# Altium PCB STM8 Oscillograph.PcbDoc (part 1 of 3)
Units mm, origin at the board's own origin, x right, y up, seen from the top; angles counter-clockwise.
Board outline 26.01 x 35.08 mm, 2 copper layers (Top Layer, Bottom Layer); 152 components, 126 nets, 536 pads, 88 vias.
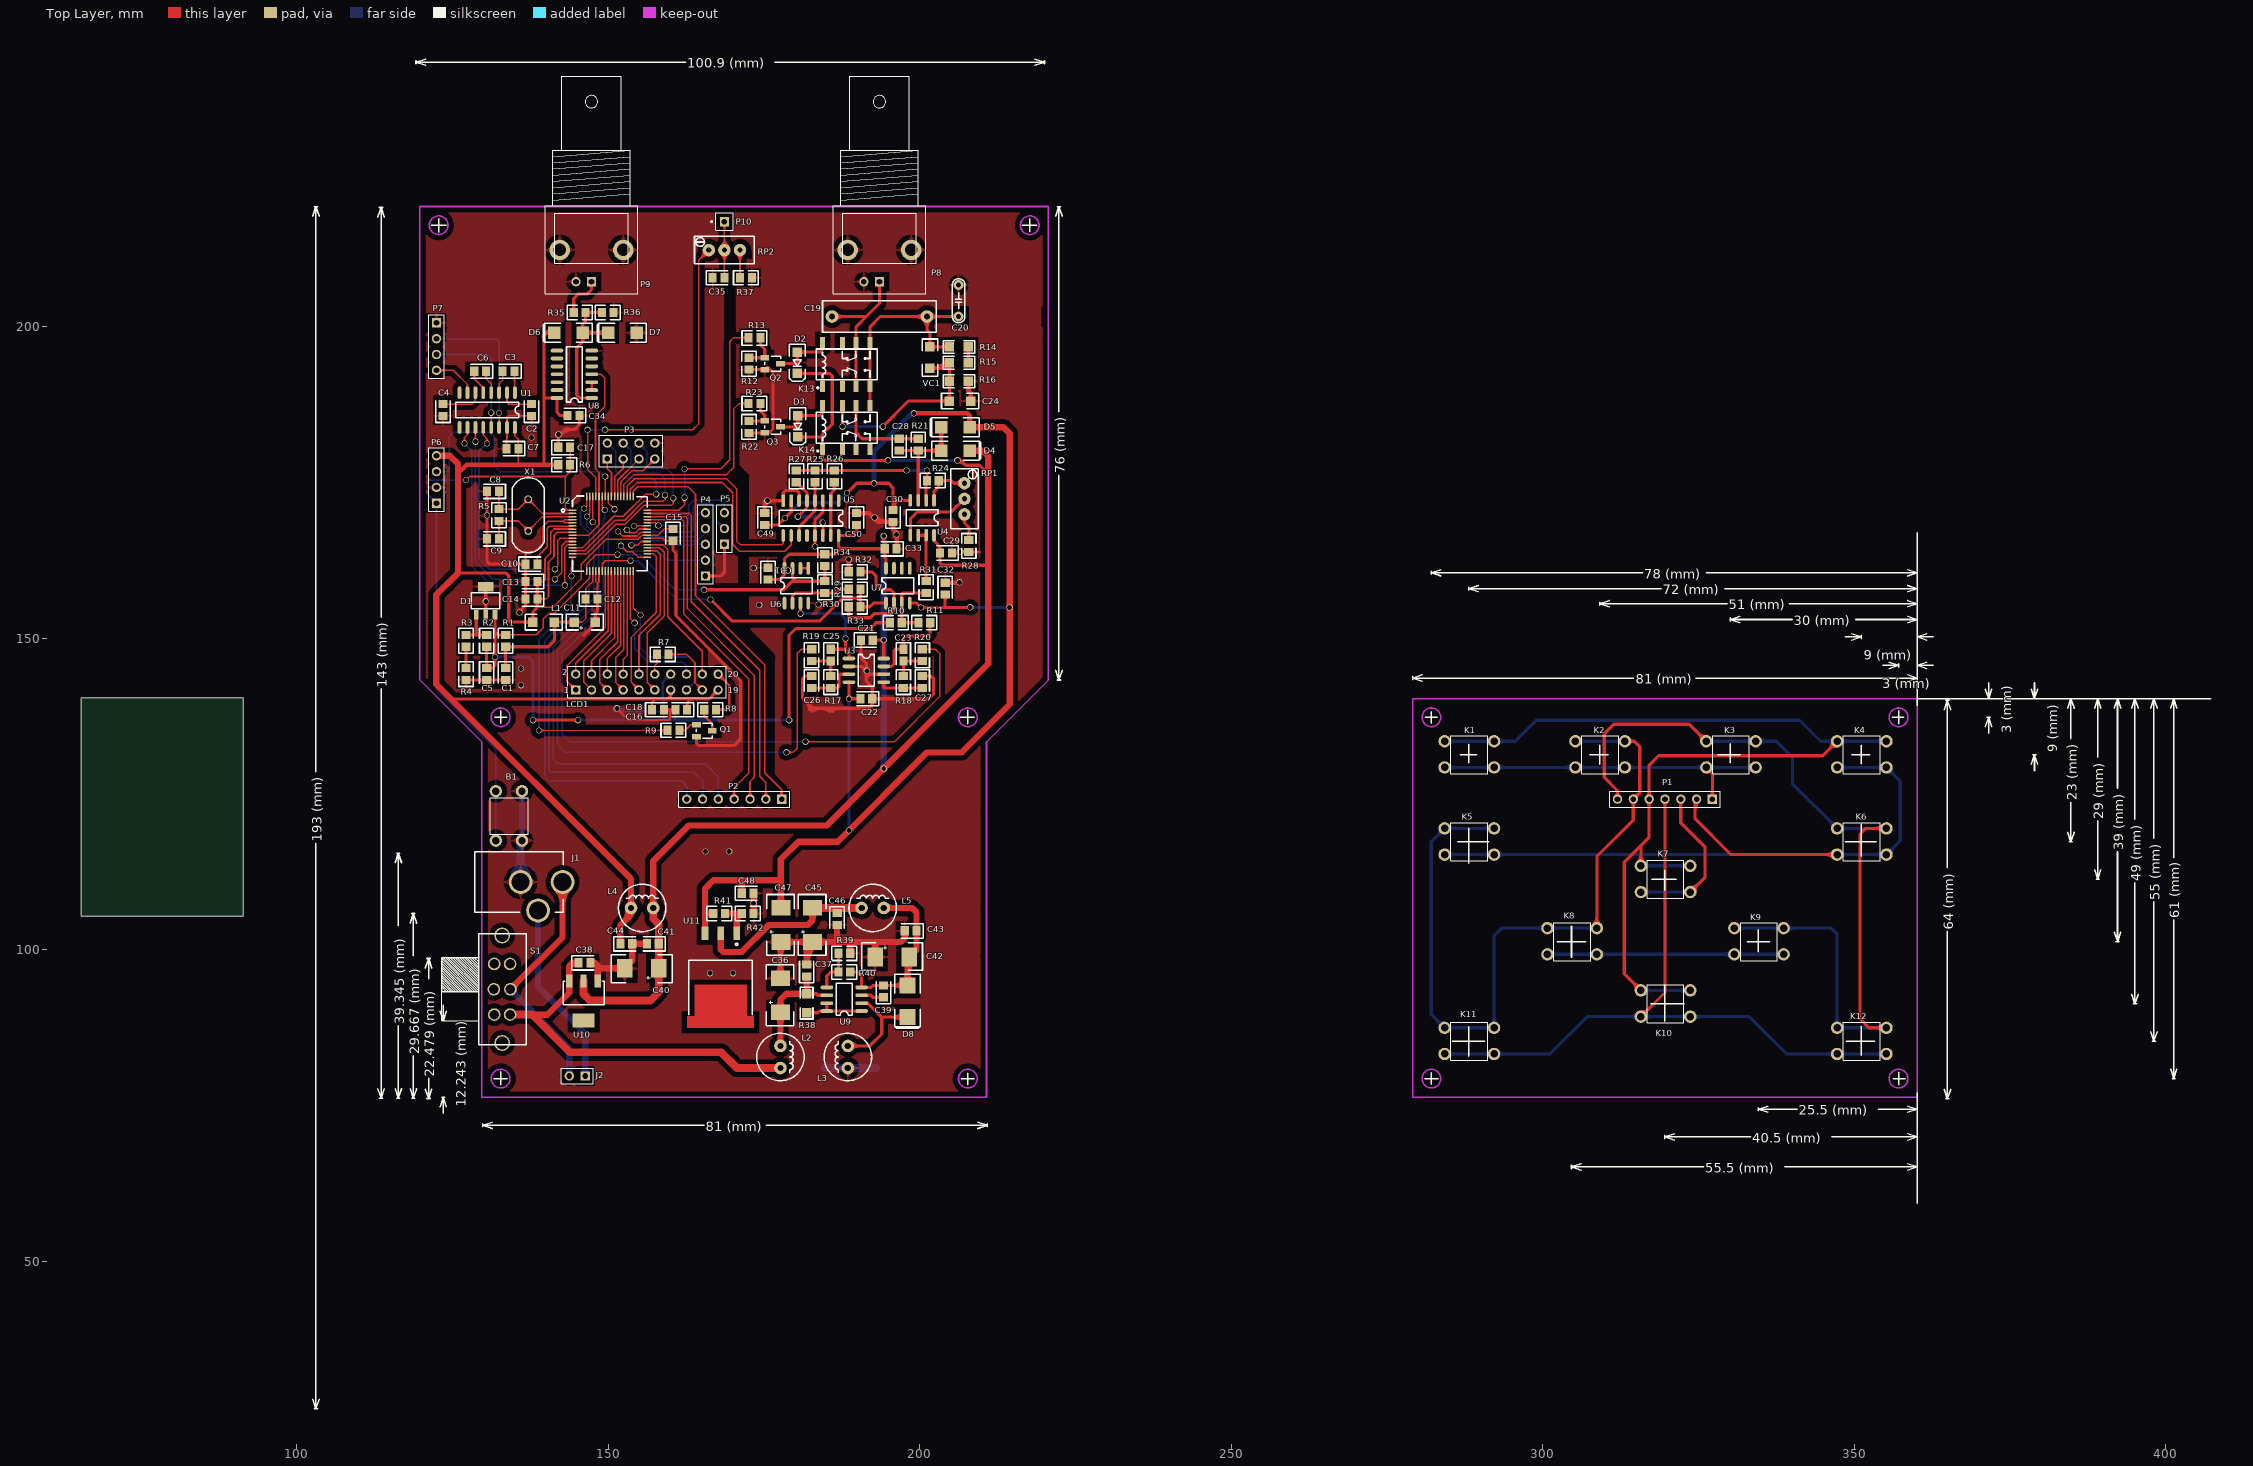
[diagram p0: Top Layer view]
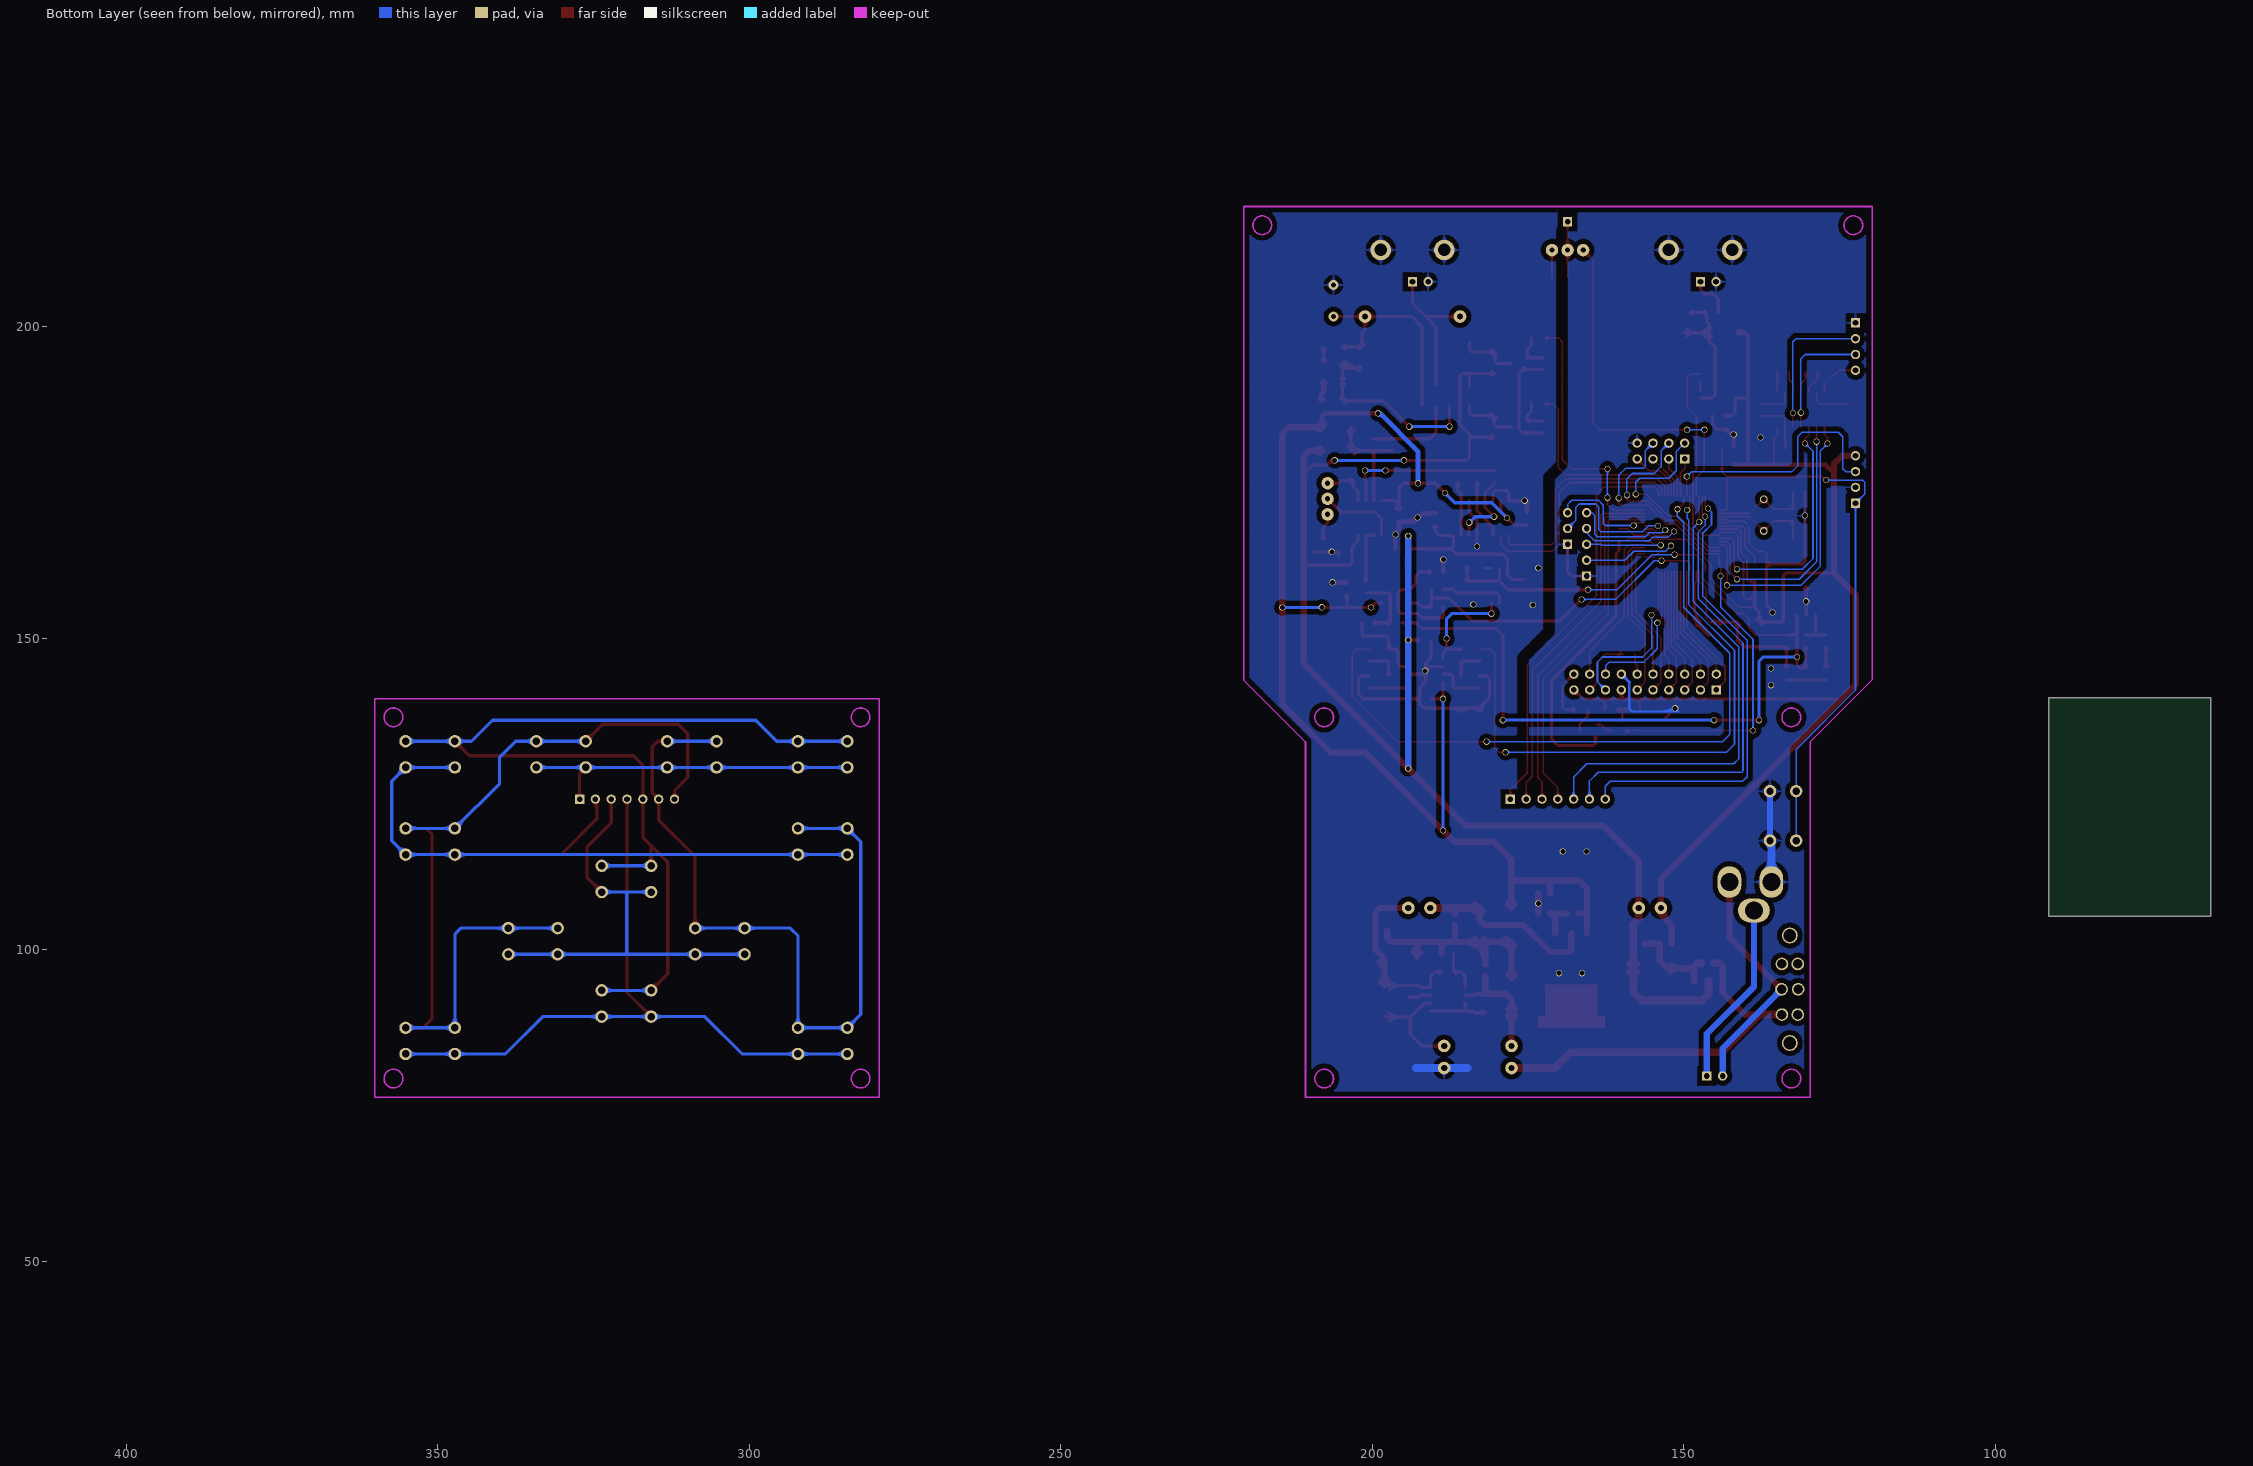
[diagram p1: Bottom Layer view, seen from below]

## Layer stack, top to bottom
Top Layer: signal copper 0.0356
Dielectric: dielectric 0.32, FR-4, Dk 4.8
Bottom Layer: signal copper 0.0356

## Board outline
65.38,140.487 91.389,140.487 91.389,105.41 65.38,105.41

## Design rules (kind name [scope] priority, off if disabled: settings)
Clearance [All] p1: gap=0.203
ComponentClearance [All] p1: gap=0.254 collisioncheckmode=3 verticalgap=0.254
PolygonConnect [All] p1: connectstyle=Relief reliefconductorwidth=0.254 reliefentries=4 polygonreliefangle="90 Angle"
RoomDefinition "Digital Part" [InComponentClass('Digital Part')] p1: confinementstyle=ConfineIn formatcopy=TRUE lockcomponents=FALSE outline 104.877,42.697 361.569,42.697 361.569,243.408 104.877,243.408
RoomDefinition CH1_ANALOG [InComponentClass('CH1_ANALOG')] p2: confinementstyle=ConfineIn formatcopy=TRUE lockcomponents=FALSE outline 157.074,138.735 219.354,138.735 219.354,241.122 157.074,241.122
RoomDefinition CH2_DIGITAL [InComponentClass('CH2_DIGITAL')] p3: confinementstyle=ConfineIn formatcopy=TRUE lockcomponents=FALSE outline 136.423,175.997 176.403,175.997 176.403,241.579 136.423,241.579
RoomDefinition Power [InComponentClass('Power')] p4: confinementstyle=ConfineIn formatcopy=TRUE lockcomponents=FALSE outline 118.923,74.092 210.49,74.092 210.49,127.66 118.923,127.66
RoutingVias [All] p1: holewidth=0.8 width=1 viastyle="Through Hole" minholewidth=0 minwidth=0 maxholewidth=10 maxwidth=20
SolderMaskExpansion [All] p1: expansion=0.102
TestPointUsage [All] p1: valid=0 allowmultiple=FALSE
Testpoint [All] p1: side=15 testpointundercomponent=TRUE minsize=1.016 maxsize=2.54 preferedsize=1.524 minholesize=0 maxholesize=1.016 preferedholesize=0.813 testpointgrid=0.025 style=1023 order=0123456789
Width [All] p1: maxlimit=2.54 minlimit=0.254 preferedwidth=0.254
18 further rules are at their usual default settings.

## Classes and differential pairs
component class CH1_ANALOG: C19 C20 C21 C22 C23 C24 C25 C26 C27 C28 C29 C30 C31 C32 C33 C49 C50 D2 D3 D4 D5 K13 K14 P8 Q2 Q3 R10 R11 R12 R13 R14 R15 R16 R17 R18 R19 R20 R21 R22 R23 R24 R25 R26 R27 R28 R29 R30 R31 R32 R33 R34 RP1 U3 U4 U5 U6 U7 VC1
component class CH2_DIGITAL: C34 C35 D6 D7 P9 P10 R35 R36 R37 RP2 U8
component class "Digital Part": B1 C1 C2 C3 C4 C5 C6 C7 C8 C9 C10 C11 C12 C13 C14 C15 C16 C17 C18 D1 K1 K2 K3 K4 K5 K6 K7 K8 K9 K10 K11 K12 L1 LCD1 P1 P2 P3 P4 P5 P6 P7 Q1 R1 R2 R3 R4 R5 R6 R7 R8 R9 U1 U2 X1
component class Power: C36 C37 C38 C39 C40 C41 C42 C43 C44 C45 C46 C47 C48 D8 J1 J2 L2 L3 L4 L5 R38 R39 R40 R41 R42 S1 U9 U10 U11

## Components (designator, comment, footprint, x,y, rotation, side; value= is the part's Value field where it differs from the comment)
B1 "RESET" PB-2 134.112,121.412 r180 top
C1 "100nF" CC2012-0805#1 133.655,144.287 r0 top
C2 "100nF" CC2012-0805#1 137.566,186.665 r180 top
C3 "100nF" CC2012-0805#1 134.01,192.761 r270 top
C4 "100nF" CC2012-0805#1 123.342,186.665 r180 top
C5 "100nF" CC2012-0805#1 130.607,144.287 r0 top
C6 "100nF" CC2012-0805#1 129.438,192.761 r270 top
C7 "100nF" CC2012-0805#1 134.62,180.34 r270 top
C8 "20pF" CC2012-0805#1 131.511,173.482 r270 top
C9 "20pF" CC2012-0805#1 131.511,165.862 r270 top
C10 "470nF" CC2012-0805#1 137.668,162.052 r90 top
C11 "10uF" C-1206 146.304,153 r180 top
C12 "100nF" CC2012-0805#1 147.32,156.464 r90 top
C13 "100nF" CC2012-0805#1 137.668,159.004 r270 top
C14 "100nF" CC2012-0805#1 137.668,156.21 r270 top
C15 "100nF" CC2012-0805#1 160.528,166.624 r0 top
C16 "100nF" CC2012-0805#1 161.723,138.43 r270 top
C17 "100nF" CC2012-0805#1 142.926,180.797 r90 top
C18 "100nF" CC2012-0805#1 157.988,138.684 r90 top
C19 "Cap" "CBB CAP" 193.548,201.676 r0 top
C20 "Cap" CO2 206.248,204.216 r270 top
C21 "Cap" CC2012-0805#1 191.516,149.86 r90 top
C22 "Cap" CC2012-0805#1 191.44,140.183 r270 top
C23 "Cap" CC2012-0805#2 197.51,147.32 r0 top
C24 "Cap" C1206 206.426,187.731 r0 top
C25 "Cap" CC2012-0805#2 185.851,147.32 r0 top
C26 "Cap" CC2012-0805#1 182.778,143.002 r0 top
C27 "Cap" CC2012-0805#1 200.558,143.002 r0 top
C28 "Cap" CC2012-0805#1 196.596,181.102 r180 top
C29 "Cap" CC2012-0805#1 204.216,163.576 r270 top
C30 "Cap" CC2012-0805#1 195.58,169.672 r180 top
C31 "Cap" CC2012-0805#1 175.768,160.401 r0 top
C32 "Cap" CC2012-0805#1 204.216,157.988 r0 top
C33 "Cap" CC2012-0805#1 195.351,164.262 r270 top
C34 "Cap" CC2012-0805#1 144.424,185.649 r270 top
C35 "Cap" CC2012-0805#1 167.706,208.026 r90 top
C36 "100uF" "Cap 3X6" 177.648,92.634 r90 top
C37 "100nF" CC2012-0805#1 181.737,96.698 r180 top
C38 "100nF" CC2012-0805#1 146.177,98.044 r90 top
C39 "470pF" CC2012-0805#1 194.056,93.345 r180 top
C40 "100uF" "Cap 3X6" 155.448,97.028 r180 top
C41 "100nF" CC2012-0805#1 157.165,100.838 r270 top
C42 "1000uF" "Cap 3X6" 195.504,98.857 r0 top
C43 "100nF" CC2012-0805#1 198.552,102.921 r270 top
C44 "100nF" CC2012-0805#1 152.908,101.092 r90 top
C45 "100uF" "Cap 3X6" 182.804,103.937 r90 top
C46 "100nF" CC2012-0805#1 186.868,104.953 r0 top
C47 "100uF" "Cap 3X6" 177.724,103.937 r90 top
C48 "100nF" CC2012-0805#1 172.39,109.22 r90 top
C49 "Cap" CC2012-0805#1 175.26,169.164 r0 top
C50 "Cap" CC2012-0805#1 189.992,169.164 r0 top
D1 "TL431" SOT-89 130.327,156.301 r0 top
D2 "IN4148" DIODE 180.34,194.056 r90 top
D3 "IN4148" DIODE 180.442,183.871 r90 top
D4 "Diode" SMA 205.74,180.152 r180 top
D5 "Diode" SMA 205.74,183.896 r0 top
D6 "Diode" SMA 143.637,199.06 r0 top
D7 "Diode" SMA 152.273,199.06 r0 top
D8 "1N5819" SMC 198.044,91.745 r90 top
J1 "PWR2.5" "DC JACK" 135.941,110.896 r0 top
J2 "BAT" HDR1X2 146.304,79.756 r180 top
K1 "" PB-2 288.146,131.335 r90 top locked
K2 "" PB-2 309.146,131.335 r90 top locked
K3 "" PB-2 330.146,131.335 r90 top locked
K4 "" PB-2 351.146,131.335 r90 top locked
K5 "" PB-2 288.146,117.348 r90 top locked
K6 "" PB-2 351.146,117.348 r90 top locked
K7 "" PB-2 319.646,111.335 r90 top locked
K8 "" PB-2 304.646,101.335 r90 top locked
K9 "" PB-2 334.646,101.335 r90 top locked
K10 "" PB-2 319.646,91.335 r90 top locked
K11 "" PB-2 288.146,85.335 r90 top locked
K12 "" PB-2 351.146,85.335 r90 top locked
K13 "G6K-2F-Y" G6K-2F-Y 184.404,190.5 r0 top
K14 "G6K-2F-Y" G6K-2F-Y 184.404,180.34 r0 top
L1 "100uH" L-1206 139.7,153 r180 top
L2 "10uH" L1.4/3 177.648,82.804 r270 top
L3 "220uH" L1.4/3 188.468,82.804 r90 top
L4 "10uH" L1.4/3 155.448,106.734 r0 top
L5 "10uH" L1.4/3 192.456,106.734 r0 top
LCD1 "LCM19264" HDR2X10 144.78,141.732 r0 top
P1 "Header 7" HDR1X7 327.266,124.206 r180 top locked
P2 "Header 7" HDR1X7 177.845,124.206 r180 top locked
P3 "Rev IO" HDR2X4_CEN 149.86,178.816 r0 top
P4 "SPI" HDR1X5 165.608,160.02 r90 top
P5 "CAN" HDR1X3 168.656,165.1 r90 top
P6 "SWIM" HDR1X4 122.428,171.704 r90 top
P7 "UART" HDR1X4 122.428,200.66 r270 top
P8 "CH1" "BNC_RA CON" 193.548,207.264 r270 top
P9 "CH2" "BNC_RA CON" 147.32,207.264 r270 top
P10 "PROBE_CAL" PIN1 168.656,216.916 r90 top
Q1 "9014" SOT-23 165.303,135.128 r270 top
Q2 "9014" SOT-23 176.276,194.056 r270 top
Q3 "9014" SOT-23 176.276,183.896 r270 top
R1 "680" CR2012-0805 133.655,149.875 r180 top
R2 "100K" CR2012-0805 130.607,149.875 r180 top
R3 "30K" CR2012-0805 127.051,149.367 r0 top
R4 "2K" CR2012-0805 127.051,144.033 r0 top
R5 "1M" CR2012-0805 132.588,170.053 r180 top
R6 "10K" CR2012-0805 143.18,177.749 r90 top
R7 "*" CR2012-0805 159.004,147.32 r90 top
R8 "3.3K" CR2012-0805 166.624,138.43 r90 top
R9 "3.3K" CR2012-0805 160.731,135.128 r90 top
R10 "Res2" CR2012-0805 195.925,152.654 r270 top
R11 "Res2" CR2012-0805 201,152.4 r90 top
R12 "Res2" CR2012-0805 172.72,194.361 r180 top
R13 "Res2" CR2012-0805 173.736,198.12 r90 top
R14 "Res2" R-1206 206.299,196.799 r180 top
R15 "Res2" R-1206 206.299,194.259 r0 top
R16 "Res2" R-1206 206.299,191.287 r180 top
R17 "Res2" CR2012-0805 185.851,143.256 r180 top
R18 "Res2" CR2012-0805 197.51,143.256 r180 top
R19 "Res2" CR2012-0805 182.778,147.574 r180 top
R20 "Res2" CR2012-0805 200.558,147.574 r180 top
R21 "Res2" CR2012-0805 199.898,181.356 r180 top
R22 "Res2" CR2012-0805 172.72,184.201 r180 top
R23 "Res2" CR2012-0805 173.736,187.579 r90 top
R24 "Res2" CR2012-0805 201.854,175.463 r270 top
R25 "Res2" CR2012-0805 183.312,176.276 r180 top
R26 "Res2" CR2012-0805 186.436,176.276 r180 top
R27 "Res2" CR2012-0805 180.34,176.276 r180 top
R28 "Res2" CR2012-0805 207.772,164.592 r0 top
R29 "Res2" CR2012-0805 189.306,158.013 r270 top
R30 "Res2" CR2012-0805 184.912,158.496 r180 top
R31 "Res2" CR2012-0805 201.168,158.496 r180 top
R32 "Res2" CR2012-0805 189.814,160.553 r90 top
R33 "Res2" CR2012-0805 189.306,155.2 r270 top
R34 "Res2" CR2012-0805 184.658,162.306 r0 top
R35 "Res2" CR2012-0805 145.669,202.184 r90 top
R36 "Res2" CR2012-0805 149.667,202.438 r270 top
R37 "Res2" CR2012-0805 172.36,207.772 r90 top
R38 "0.51" R-1206 181.864,91.44 r270 top
R39 "7.5K" CR2012-0805 187.655,99.568 r270 top
R40 "1.5K" CR2012-0805 188.163,96.317 r90 top
R41 "120" CR2012-0805 167.564,105.969 r270 top
R42 "360" CR2012-0805 172.136,105.969 r270 top
RP1 "RPot" VR 207.188,172.415 r90 top
RP2 "2K" VR 168.656,212.344 r180 top
S1 "SW-Power" SW-6B 132.969,93.675 r90 top
U1 "ST3232ECTR" SO-16 129.946,186.665 r270 top
U2 "STM8S208RBT6" TQFP-64 150.368,166.497 r270 top locked
U3 "LM358" SO-8 191.44,144.247 r0 top
U4 "TL082" SO-8 199.771,169.367 r270 top
U5 "74VHC4052WM" SO-16 181.915,169.316 r270 top
U6 "LM311N" SO-8 180.848,158.471 r90 top
U7 "TL082" SO-8 197.129,158.471 r90 top
U8 "7404" SO-14 144.577,192.405 r180 top
U9 "MC34063" SO-8 187.884,92.71 r180 top
U10 "AMS1117-5" SOT-223 145.796,91.948 r90 top
U11 "LM337" D2PAK 168.072,97.841 r180 top
VC1 "Cap Var" C1206 201.27,195.148 r270 top
X1 "16MHz" CRYSTAL 137.16,169.799 r180 top

## Footprints (in the part's own frame and the unit in brackets; to place one, negate y for a bottom-side part, rotate by r counter-clockwise, add the part's x,y. Pads: shape width x height; smd on the part's side, far side on the other; paste and mask are expansions set on the pad)
"BNC_RA CON" [mm] "Connector; BNC Elbow"
  rect 1.5x1.5 hole 0.9: 1(0,0)
  round 3.3 hole 2: 2(-5.1,5.1) 2(-5.1,-5.1)
  round 1.5 hole 0.9: 2(0,-2.5)
  silkscreen extent -33,-7.4 1.9,7.4
C1206 [mil] "C1206"
  rect 60x60 smd: 1(70,15) 2(-65,15)
  silkscreen extent -115,-35 120,65
C-1206 [mil] "C-1206"
  rect 60x60 smd: 1(70,15) 2(-65,15)
  silkscreen extent -115,-35 120,65
"Cap 3X6" [mm] "CAP 3X6"
  rect 2.5x3 smd: 1(-2.667,0) 2(2.797,0)
  silkscreen extent -4.83,-2.16 4.95,2.29
"CBB CAP" [mil] "CBB CAP"
  round 80 hole 40: 1(-300,0) 2(300,0)
  silkscreen extent -360,-100 360,100
CC2012-0805#1 [mm] "CC2012-0805"
  rect 1.5x1.3 smd: 1(-0.127,0.95) 2(-0.127,-0.95)
  silkscreen extent -1.28,-1.5 1.02,2
CC2012-0805#2 [mm] "CC2012-0805"
  rect 1.3x1.5 smd: 1(-0.127,0.95) 2(-0.127,-0.95)
  silkscreen extent -1.28,-1.5 1.02,2
CO2 [mil] "CO2"
  round 62 hole 32: 1(-100,0) 2(100,0)
  silkscreen extent -140,-40 140,40
CR2012-0805 [mm] "CR2012-0805"
  rect 1.5x1.3 smd: 1(0.127,1.204) 2(0.127,-0.696)
  silkscreen extent -1.02,-1.75 1.28,2.25
CRYSTAL [mil] "CRYSTAL"
  round 50 hole 32: 1(0,100) 2(0,-100)
  silkscreen extent -100,-238 100,238
D2PAK [mm] "D2PAK"
  rect 1.07x2.16 smd: 1(-2.54,-4.851) 2(0,-4.851) 3(2.54,-4.851)
  Top Layer region: -5.339,10.389 -5.339,8.479 5.461,8.479 5.461,10.389
  Top Layer region: -4.191,8.478 -4.191,3.398 4.226,3.398 4.226,8.478
  silkscreen extent -5.04,-3.23 5.16,8.28
"DC JACK" [mil] "DC JACK"
  round 150 / inner round 150 / far side oval 150x200 hole 115: 1(265,0) 2(0,0)
  round 150 / inner round 150 / far side oval 200x150 hole 115: 3(110,-180)
  silkscreen extent -290,-190 270,190
DIODE [mil] "DIODE"
  rect 60x60 smd: 1(75,0) 2(-60,0)
  silkscreen extent -110,-50 125,50
G6K-2F-Y [mm] "G6K-2F-Y"
  rect 0.8x1.8 smd: 1(0,0) 2(3.2,0) 3(5.4,0) 4(7.6,0) 5(7.6,7) 6(5.4,7) 7(3.2,7) 8(0,7)
  silkscreen extent -1.02,-0.38 8.76,5.97
HDR1X2 [mm] "Connector; Header; 2 Position"
  rect 1.5x1.5 hole 0.9: 1(0,0)
  round 1.5 hole 0.9: 2(2.54,0)
  silkscreen extent -1.27,-1.27 3.81,1.27
HDR1X3 [mm] "Connector; Header; 3 Position"
  rect 1.5x1.5 hole 0.9: 1(0,0)
  round 1.5 hole 0.9: 2(2.54,0) 3(5.08,0)
  silkscreen extent -1.27,-1.27 6.35,1.27
HDR1X4 [mm] "Connector; Header; 4 Position"
  rect 1.5x1.5 hole 0.9: 1(0,0)
  round 1.5 hole 0.9: 2(2.54,0) 3(5.08,0) 4(7.62,0)
  silkscreen extent -1.27,-1.27 8.89,1.27
HDR1X5 [mm] "Connector; Header; 5 Position"
  rect 1.5x1.5 hole 0.9: 1(0,0)
  round 1.5 hole 0.9: 2(2.54,0) 3(5.08,0) 4(7.62,0) 5(10.16,0)
  silkscreen extent -1.27,-1.27 11.43,1.27
HDR1X7 [mm] "Connector; Header; 7 Position"
  rect 1.5x1.5 hole 0.9: 1(0,0)
  round 1.5 hole 0.9: 2(2.54,0) 3(5.08,0) 4(7.62,0) 5(10.16,0) 6(12.7,0) 7(15.24,0)
  silkscreen extent -1.27,-1.27 16.51,1.27
HDR2X4_CEN [mm] "Connector; Header; 4x2 Position"
  rect 1.5x1.5 hole 0.9: 1(0,0)
  round 1.5 hole 0.9: 2(2.54,0) 3(5.08,0) 4(7.62,0) 5(0,2.54) 6(2.54,2.54) 7(5.08,2.54) 8(7.62,2.54)
  silkscreen extent -1.27,-1.27 8.89,3.81
HDR2X10 [mm] "Connector; Header; 10x2 Position"
  rect 1.5x1.5 hole 0.9: 1(0,0)
  round 1.5 hole 0.9: 2(0,2.54) 3(2.54,0) 4(2.54,2.54) 5(5.08,0) 6(5.08,2.54) 7(7.62,0) 8(7.62,2.54) 9(10.16,0) 10(10.16,2.54) 11(12.7,0) 12(12.7,2.54) 13(15.24,0) 14(15.24,2.54) 15(17.78,0) 16(17.78,2.54) 17(20.32,0) 18(20.32,2.54) 19(22.86,0) 20(22.86,2.54)
  silkscreen extent -1.27,-1.27 24.13,3.81
L1.4/3 [mil] "L1.4/3"
  round 80 hole 40: 1(70,0) 2(-70,0)
  silkscreen extent -150,-150 150,150
L-1206 [mil] "L-1206"
  rect 60x60 smd: 1(70,15) 2(-65,15)
  silkscreen extent -115,-35 120,65
PB-2 [mm] "PB-2"
  round 2 hole 1.2: 1(-2.048,-4.064) 2(2.159,-4.064) 3(2.159,3.866) 4(-2.048,3.866)
  silkscreen extent -3.05,-3.05 3.05,2.87
PIN1 [mm] "Connector; Plug"
  rect 1.5x1.5 hole 0.9: 1(0,0)
  silkscreen extent -1.4,-1.4 1.4,2.17
R-1206 [mil] "R-1206"
  rect 60x60 smd: 1(-60,0) 2(60,0)
  silkscreen extent -100,-40 100,40
SMA [mil] "SMA"
  rect 80x80 smd: 1(90,0) 2(-90,0)
  silkscreen extent -160,-60 150,60
SMC [mm] "SMC"
  rect 2.54x2.54 smd: 1(2.54,0) 2(-2.54,0)
  silkscreen extent -4.32,-2.03 4.32,2.03
SO-8 [mil] "SO-8"
  oval 80x24 smd: 1(-110,100) 2(-110,50) 3(-110,0) 4(-110,-50) 5(110,-50) 6(110,0) 7(110,50) 8(110,100)
  silkscreen extent -50,-75 50,125
SO-14 [mil] "SO-14"
  oval 80x24 smd: 1(-110,150) 2(-110,100) 3(-110,50) 4(-110,0) 5(-110,-50) 6(-110,-100) 7(-110,-150) 8(110,-150) 9(110,-100) 10(110,-50) 11(110,0) 12(110,50) 13(110,100) 14(110,150)
  silkscreen extent -50,-175 50,175
SO-16 [mil] "SO-16"
  oval 80x24 smd: 1(-110,200) 2(-110,150) 3(-110,100) 4(-110,50) 5(-110,0) 6(-110,-50) 7(-110,-100) 8(-110,-150) 9(110,-150) 10(110,-100) 11(110,-50) 12(110,0) 13(110,50) 14(110,100) 15(110,150) 16(110,200)
  silkscreen extent -50,-175 50,225
SOT-23 [mil]
  rect 35x55 smd: 1(-40,-45) 2(35,-45) 3(-2.5,55)
  silkscreen extent -50,-45 45,55
SOT-89 [mil] "SOT-89"
  rect 30x60 smd: 1(-59.06,-100) 2(0,-100) 3(59.06,-100)
  rect 100x60 smd: 2(0,80)
  silkscreen extent -90,-60 90,40
SOT-223 [mil] "SOT-223"
  rect 80x39.37 smd: 1(120,-100) 2(120,-9.45) 3(120,81.1)
  rect 90x140 smd: 4(-130,-10)
  silkscreen extent -30,-140 120,120
SW-6B [mil]
  round 100 hole 80: 0(-340,0) 0(340,0)
  round 80 hole 60: 1(0,-52.5) 2(160,-50) 3(-160,-50) 4(0,52.5) 5(160,50) 6(-160,50)
  silkscreen extent -350,-153 350,382
TQFP-64 [mm] "TQFP-64"
  rect 0.25x1.27 smd: 1(-4.064,-6.096)
  oval 0.25x1.27 smd: 2(-3.564,-6.096) 3(-3.064,-6.096) 4(-2.564,-6.096) 5(-2.064,-6.096) 6(-1.564,-6.096) 7(-1.064,-6.096) 8(-0.564,-6.096) 9(-0.064,-6.096) 10(0.436,-6.096) 11(0.936,-6.096) 12(1.436,-6.096) 13(1.936,-6.096) 14(2.436,-6.096) 15(2.936,-6.096) 16(3.436,-6.096) 33(3.436,5.904) 34(2.936,5.904) 35(2.436,5.904) 36(1.936,5.904) 37(1.436,5.904) 38(0.936,5.904) 39(0.436,5.904) 40(-0.064,5.904) 41(-0.564,5.904) 42(-1.064,5.904) 43(-1.564,5.904) 44(-2.064,5.904) 45(-2.564,5.904) 46(-3.064,5.904) 47(-3.564,5.904) 48(-4.064,5.904)
  oval 1.27x0.25 smd: 17(5.686,-3.846) 18(5.686,-3.346) 19(5.686,-2.846) 20(5.686,-2.346) 21(5.686,-1.846) 22(5.686,-1.346) 23(5.686,-0.846) 24(5.686,-0.346) 25(5.686,0.154) 26(5.686,0.654) 27(5.686,1.154) 28(5.686,1.654) 29(5.686,2.154) 30(5.686,2.654) 31(5.686,3.154) 32(5.686,3.654) 49(-6.314,3.654) 50(-6.314,3.154) 51(-6.314,2.654) 52(-6.314,2.154) 53(-6.314,1.654) 54(-6.314,1.154) 55(-6.314,0.654) 56(-6.314,0.154) 57(-6.314,-0.346) 58(-6.314,-0.846) 59(-6.314,-1.346) 60(-6.314,-1.846) 61(-6.314,-2.346) 62(-6.314,-2.846) 63(-6.314,-3.346) 64(-6.314,-3.846)
  silkscreen extent -6.36,-7.87 5.74,5.9
VR [mm] "VR"
  round 2 hole 0.85: 1(-2.5,0) 2(0,0) 3(2.5,0)
  silkscreen extent -4.8,-2.2 4.8,2.2

## Part data
B1: library part "SW PUSHBUTTON", "SE PUSHBUTTON"
C1 C2 C3 C4 C5 C6 C7 C8 C9 C10 C12 C13 C14 C15 C16 C17 C18 C38: library part CAP, "Capacitor"
C11: library part "Cap Pol1", "Polarized Capacitor (Radial)"
C19 C20 C21 C22 C23 C24 C25 C26 C27 C28 C29 C30 C31 C32 C33 C34 C35 C49 C50: "Capacitor"
C36 C40 C42 C45 C47: library part "CAPACITOR POL", "Capacitor"
C37 C39 C41 C43 C44 C46 C48: library part Cap, "Capacitor"
D2 D3: library part Diode, "Default Diode"
D4 D5 D6 D7: "Default Diode"
D8: library part "D Zener", "Zener Diode"
J1: "Low Voltage Power Supply Connector"
J2: library part "Header 2", "Header, 2-Pin"
K1 K2 K3 K4 K5 K6 K7 K8 K9 K10 K11 K12: library part SW-PB
K13: library part Relay-SPST, "Single-Pole Single-Throw Relay"
K14: library part Relay-SPDT, "Single-Pole Dual-Throw Relay"
L1: library part Inductor, "Inductor"
L2 L3 L4 L5: library part "Inductor Iron", "Magnetic-Core Inductor"
P1 P2: "Header, 7-Pin"
P3: library part "Header 4X2A", "Header, 4-Pin, Dual row"
P4: library part "Header 5", "Header, 5-Pin"
P5: library part "Header 3", "Header, 3-Pin"
P6 P7: library part "Header 4", "Header, 4-Pin"
P8 P9: library part BNC, "BNC Elbow Connector"
P10: library part Plug, "Plug"
Q1: library part 2N3904, "NPN General Purpose Amplifier"
Q2 Q3: library part NPN, "NPN Bipolar Transistor"
R1 R2 R3 R4 R5 R6 R7 R8 R9 R38 R39 R40 R41 R42: library part Res2, "Resistor"
R10 R11 R12 R13 R14 R15 R16 R17 R18 R19 R20 R21 R22 R23 R24 R25 R26 R27 R28 R29 R30 R31 R32 R33 R34 R35 R36 R37: "Resistor"
RP1: "Potentiometer"
RP2: library part RPot, "Potentiometer"
S1: library part SW-SPDT, "SPDT Subminiature Toggle Switch, Right Angle Mounting, Vertical Actuation"
U1: library part ST3232, "3.3V/5V Dual RS232 Transceiver w/ Int. Cap."
U5: "Dual 4-Channel Analog Multiplexer"
U6: "High-Performance Voltage Comparator"
U10: library part "Volt Reg", "Voltage Regulator"
VC1: "Variable or Adjustable Capacitor"
X1: library part CRYSTAL, "Crystal"

## Via types
v1: diameter 1, hole 0.8, Top Layer to Bottom Layer, tented both sides, 88 vias

## Nets (pads, with @x,y where several pads share a name; then routed paths per layer and width w, separated by ;. In a path a pad name is that pad's centre, name@x,y a point inside that pad or via, vN(x,y) a via of type N, cw(c..) or ccw(c..) an arc to the next point about the centre after c; other vN are vias at no path point)
+5V: C21.2 C29.2 C31.2 C33.2 C40.1 C41.1 C50.2 D2.2 D3.2 D4.2 K13.1 K14.1 L4.1 R34.1 U3.8 U4.8 U5.16 U6.8 U7.8 U10.2 | length 311.4
  Top Layer w0.508: C31.2@175.646,159.446 177.531,159.446 178.308,160.223 178.308,162.789 179.029,163.51 186.472,163.51 187.35,164.389 ; 177.988,159.903 ccw(c177.337,160.553) U6.8@178.257,160.553 ; D2.2@180.34,192.532 185.547,192.532 185.953,192.126 185.953,184.379 184.404,182.829 184.404,178.968 184.785,178.587 v1(194.894,178.587) ; D3.2@180.442,182.347 184.074,182.347 184.404,182.016 ; D2.2@180.699,192.173 cw(c181.566,191.306) 181.566,192.532 cw(c181.566,193.758) D2.2@180.699,192.891 ; D3.2@180.801,181.987 cw(c181.668,181.12) 181.668,182.347 cw(c181.668,183.573) D3.2@180.801,182.706 ; 184.125,192.532 184.404,192.253 K13.1@184.404,190.5 ; C50.2@189.585,167.934 cw(c188.909,167.258) 189.865,167.258 cw(c190.821,167.258) C50.2@190.145,167.934 ; C50.2@189.865,168.214 189.865,167.157 189.23,166.522 U5.16@186.995,166.522 186.995,164.744 187.35,164.389 ; C21.2@192.466,149.733 v1@194.132,149.733 ; C21.2@192.746,149.453 cw(c193.422,148.777) 193.422,149.733 cw(c193.422,150.689) C21.2@192.746,150.013 ; v1@194.06,149.907 cw(c193.64,150.327) 193.64,149.733 cw(c193.64,149.139) 194.06,149.559 cw(c193.641,149.14) 194.234,149.14 ; v1@194.06,166.272 cw(c193.641,165.853) 194.234,165.853 ; C33.2@194.121,164.109 ccw(c193.445,163.433) 193.445,164.389 ccw(c193.445,165.345) C33.2@194.121,164.669 ; U3.8@194.234,146.787 v1(194.234,149.733) ; 194.234,149.139 cw(c194.828,149.139) v1@194.408,149.559 ; 194.234,165.852 cw(c194.828,165.852) v1@194.408,166.272 ; v1(194.234,166.446) 194.234,165.583 194.401,165.415 194.401,163.027 194.589,162.839 U7.8@194.589,161.265 ; 194.299,178.587 cw(c194.299,177.992) v1@194.72,178.413 ; 194.301,178.587 ccw(c194.301,179.18) v1@194.72,178.761 ; C33.2@194.401,164.389 187.35,164.389 ; U4.8@202.311,166.573 202.311,165.633 203.266,164.678 203.266,162.077 203.596,161.747 211.023,161.747 ; U4.8@202.362,165.862 ccw(c203.036,165.862) 202.559,165.385 ; 202.838,165.106 cw(c201.535,163.803) C29.2@203.378,163.803 ; v1@206.045,178.341 cw(c206.045,176.398) 207.419,177.772 ; v1(206.045,178.587) 206.604,178.587 ; v1@206.045,178.849 cw(c206.045,178.132) 206.552,178.639 ; v1@206.179,178.381 cw(c206.486,177.911) 206.883,178.308 ; v1@206.227,178.421 cw(c206.604,178.077) 206.604,178.587 ; v1@206.226,178.753 ccw(c206.604,179.1) 206.604,178.587 ; 211.023,176.378 209.601,177.8 207.391,177.8 206.604,178.587
  Top Layer w1.016: L4.1@156.867,107.093 ccw(c156,107.96) 157.226,107.96 ccw(c158.452,107.96) L4.1@157.585,107.093 ; L4.1@157.226,106.734 157.226,114.275 162.916,119.964 185.064,119.964 211.023,145.923 211.023,179.222 210.094,180.152 D4.2@208.026,180.152 ; D4.2@208.385,179.793 cw(c209.252,178.926) 209.252,180.152 cw(c209.252,181.378) D4.2@208.385,180.511
  Top Layer w1.27: U10.2@146.036,94.996 146.036,92.902 147.041,91.897 156.82,91.897 158.115,93.193 158.115,104.115 157.226,105.004 L4.1@157.226,106.734 ; C40.1@157.68,96.343 cw(c156.63,95.293) 158.115,95.293 cw(c159.6,95.293) C40.1@158.55,96.343 ; C40.1@157.68,97.713 ccw(c156.63,98.763) 158.115,98.763 ccw(c159.6,98.763) C40.1@158.55,97.713 ; v1(194.234,129.134) v1@194.234,129.184
  Bottom Layer w0.508: v1(194.894,178.587) v1(206.045,178.587) ; v1@195.068,178.413 cw(c195.489,177.992) 195.489,178.587 ; v1@195.068,178.761 ccw(c195.487,179.18) 195.487,178.587 ; 205.45,178.587 cw(c205.45,177.992) v1@205.871,178.413 ; 205.452,178.587 ccw(c205.452,179.18) v1@205.871,178.761
  Bottom Layer w1.016: v1(194.234,129.134) v1(194.234,166.446)
-5V: C22.2 C30.2 C32.2 C47.2 C48.1 C49.2 D5.1 R41.2 U3.4 U4.4 U5.7 U7.4 U11.3 | length 259.6
  Top Layer w0.508: C49.2@175.133,168.214 177.256,168.214 179.375,170.332 U5.7@179.375,172.11 ; 177.943,168.9 ccw(c177.522,169.321) v1@178.117,169.321 ; 177.944,168.901 cw(c178.363,168.482) v1@178.363,169.075 ; v1@178.363,169.567 ccw(c178.363,170.162) 178.784,169.741 ; v1@178.609,169.321 cw(c179.202,169.321) 178.783,169.74 ; v1(188.316,173.33) 189.89,174.904 195.021,174.904 195.707,174.219 C30.2@195.707,170.622 ; v1@188.316,173.576 ccw(c188.316,174.17) 188.736,173.75 ccw(c189.156,173.33) v1@188.562,173.33 ; v1@188.472,140.484 ccw(c188.053,140.903) 188.646,140.903 ccw(c189.24,140.904) 188.82,140.484 ccw(c189.241,140.905) 189.241,140.31 ; U3.4@188.646,142.977 v1(188.646,140.31) C22.2@190.49,140.31 ; v1@188.82,140.136 cw(c189.239,139.717) 189.239,140.31 ; v1@192.51,174.73 ccw(c192.091,174.311) 192.091,174.904 ccw(c192.091,175.498) v1@192.51,175.078 ; v1@192.858,174.73 cw(c193.278,174.311) 193.278,174.904 cw(c193.278,175.498) v1@192.858,175.078 ; C30.2@195.427,170.902 ccw(c194.751,171.578) 195.707,171.578 ccw(c196.663,171.578) C30.2@195.987,170.902 ; 195.707,171.501 196.367,172.161 ; C30.2@195.708,170.57 cw(c196.543,171.005) 195.877,171.671 ; C30.2@196.158,170.805 cw(c197.188,171.34) 196.367,172.161 ; U7.4@198.399,155.677 199.517,155.677 v1(200.228,154.965) v1@208.102,154.965 ; U4.4@198.501,172.161 196.367,172.161 ; v1@199.982,154.965 ccw(c199.388,154.965) 199.808,155.385 ccw(c200.228,155.805) v1@200.228,155.211 ; v1@200.402,154.791 cw(c200.822,154.372) 200.822,154.965 cw(c200.822,155.559) v1@200.402,155.139 ; C32.2@203.809,156.758 cw(c203.133,156.082) 204.089,156.082 cw(c205.045,156.082) C32.2@204.369,156.758 ; 204.089,154.965 C32.2@204.089,157.038 ; 207.447,154.965 ccw(c207.447,155.646) v1@207.928,155.165 ; 207.57,154.965 cw(c207.57,154.458) v1@207.928,154.817
  Top Layer w0.762: v1(199.085,186.131) 207.67,186.131 208.026,185.776 D5.1@208.026,183.896 ; D5.1@207.577,184.345 ccw(c206.493,185.429) 208.026,185.429 ccw(c209.559,185.429) D5.1@208.475,184.345
  Top Layer w1.016: U11.3@165.532,102.692 165.532,109.83 166.878,111.176 177.724,111.176 ; 165.608,105.842 R41.2@166.868,105.842 ; C48.1@171.44,109.093 171.44,111.166 ; C47.2@177.199,107.258 ccw(c175.932,108.525) 177.724,108.525 ccw(c179.515,108.525) C47.2@178.248,107.258 ; C47.2@177.724,106.734 177.724,114.554 180.543,117.373 186.842,117.373 201.168,131.699 206.731,131.699 214.452,139.421 214.452,182.905 213.462,183.896 D5.1@208.026,183.896 ; D5.1@208.385,183.537 cw(c209.252,182.67) 209.252,183.896 cw(c209.252,185.122) D5.1@208.385,184.255
  Bottom Layer w0.508: v1(178.363,169.321) 180.823,171.78 186.766,171.78 v1(188.316,173.33) ; v1@178.363,169.567 ccw(c178.363,170.162) 178.784,169.741 ; v1@178.609,169.321 cw(c179.202,169.321) 178.783,169.74 ; v1@188.07,173.33 cw(c187.476,173.33) 187.896,172.91 cw(c188.316,172.49) v1@188.316,173.084 ; v1@188.472,119.351 ccw(c188.053,119.77) 188.646,119.77 ; v1@188.472,140.136 cw(c188.053,139.717) 188.646,139.717 ; v1(188.646,119.177) v1(188.646,140.31) ; 188.646,119.771 ccw(c189.24,119.771) v1@188.82,119.351 ; 188.646,139.716 cw(c189.24,139.716) v1@188.82,140.136 ; v1@208.102,154.965 v1(214.452,154.965) ; v1@208.276,154.817 cw(c208.635,154.458) 208.635,154.965 ; v1@208.276,155.165 ccw(c208.757,155.646) 208.757,154.965 ; 213.857,154.965 cw(c213.857,154.37) v1@214.278,154.791 ; 213.859,154.965 ccw(c213.859,155.558) v1@214.278,155.139
  Bottom Layer w0.762: v1(192.684,174.904) 192.684,180.061 198.755,186.131 v1(199.085,186.131) ; 198.318,185.695 cw(c199.085,184.928) v1@199.085,186.012
  other v1: 208.102,154.991